# Altium PCB PCB1.PcbDoc
Units mm, origin at the board's own origin, x right, y up, seen from the top; angles counter-clockwise.
Board outline 50 x 50 mm, 2 copper layers (Top Layer, Bottom Layer); 18 components, 9 nets, 49 pads, 8 vias.
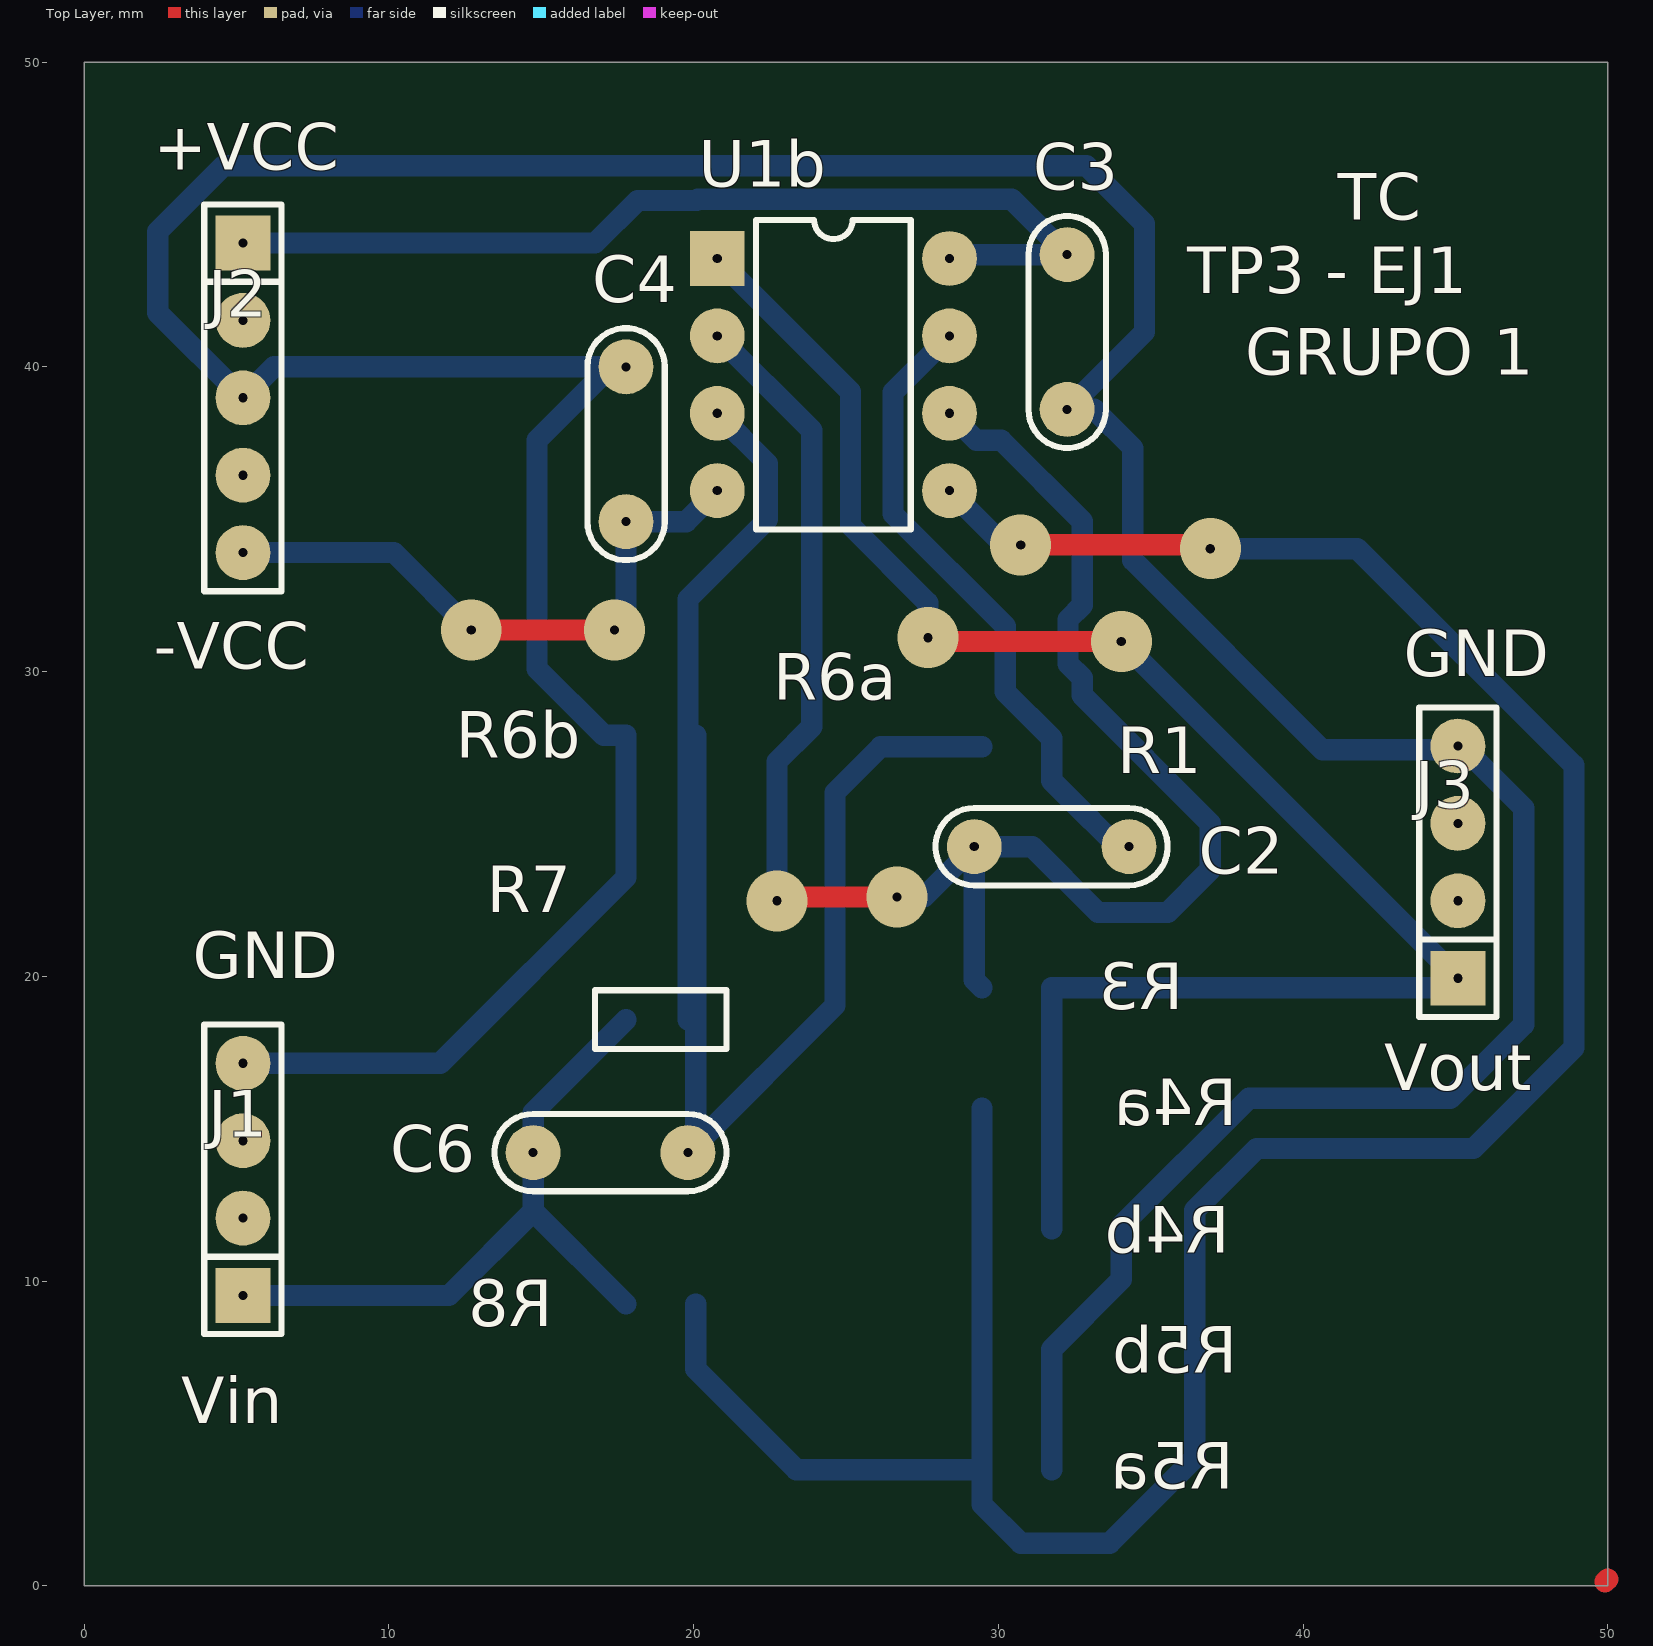
[diagram p0: Top Layer view]
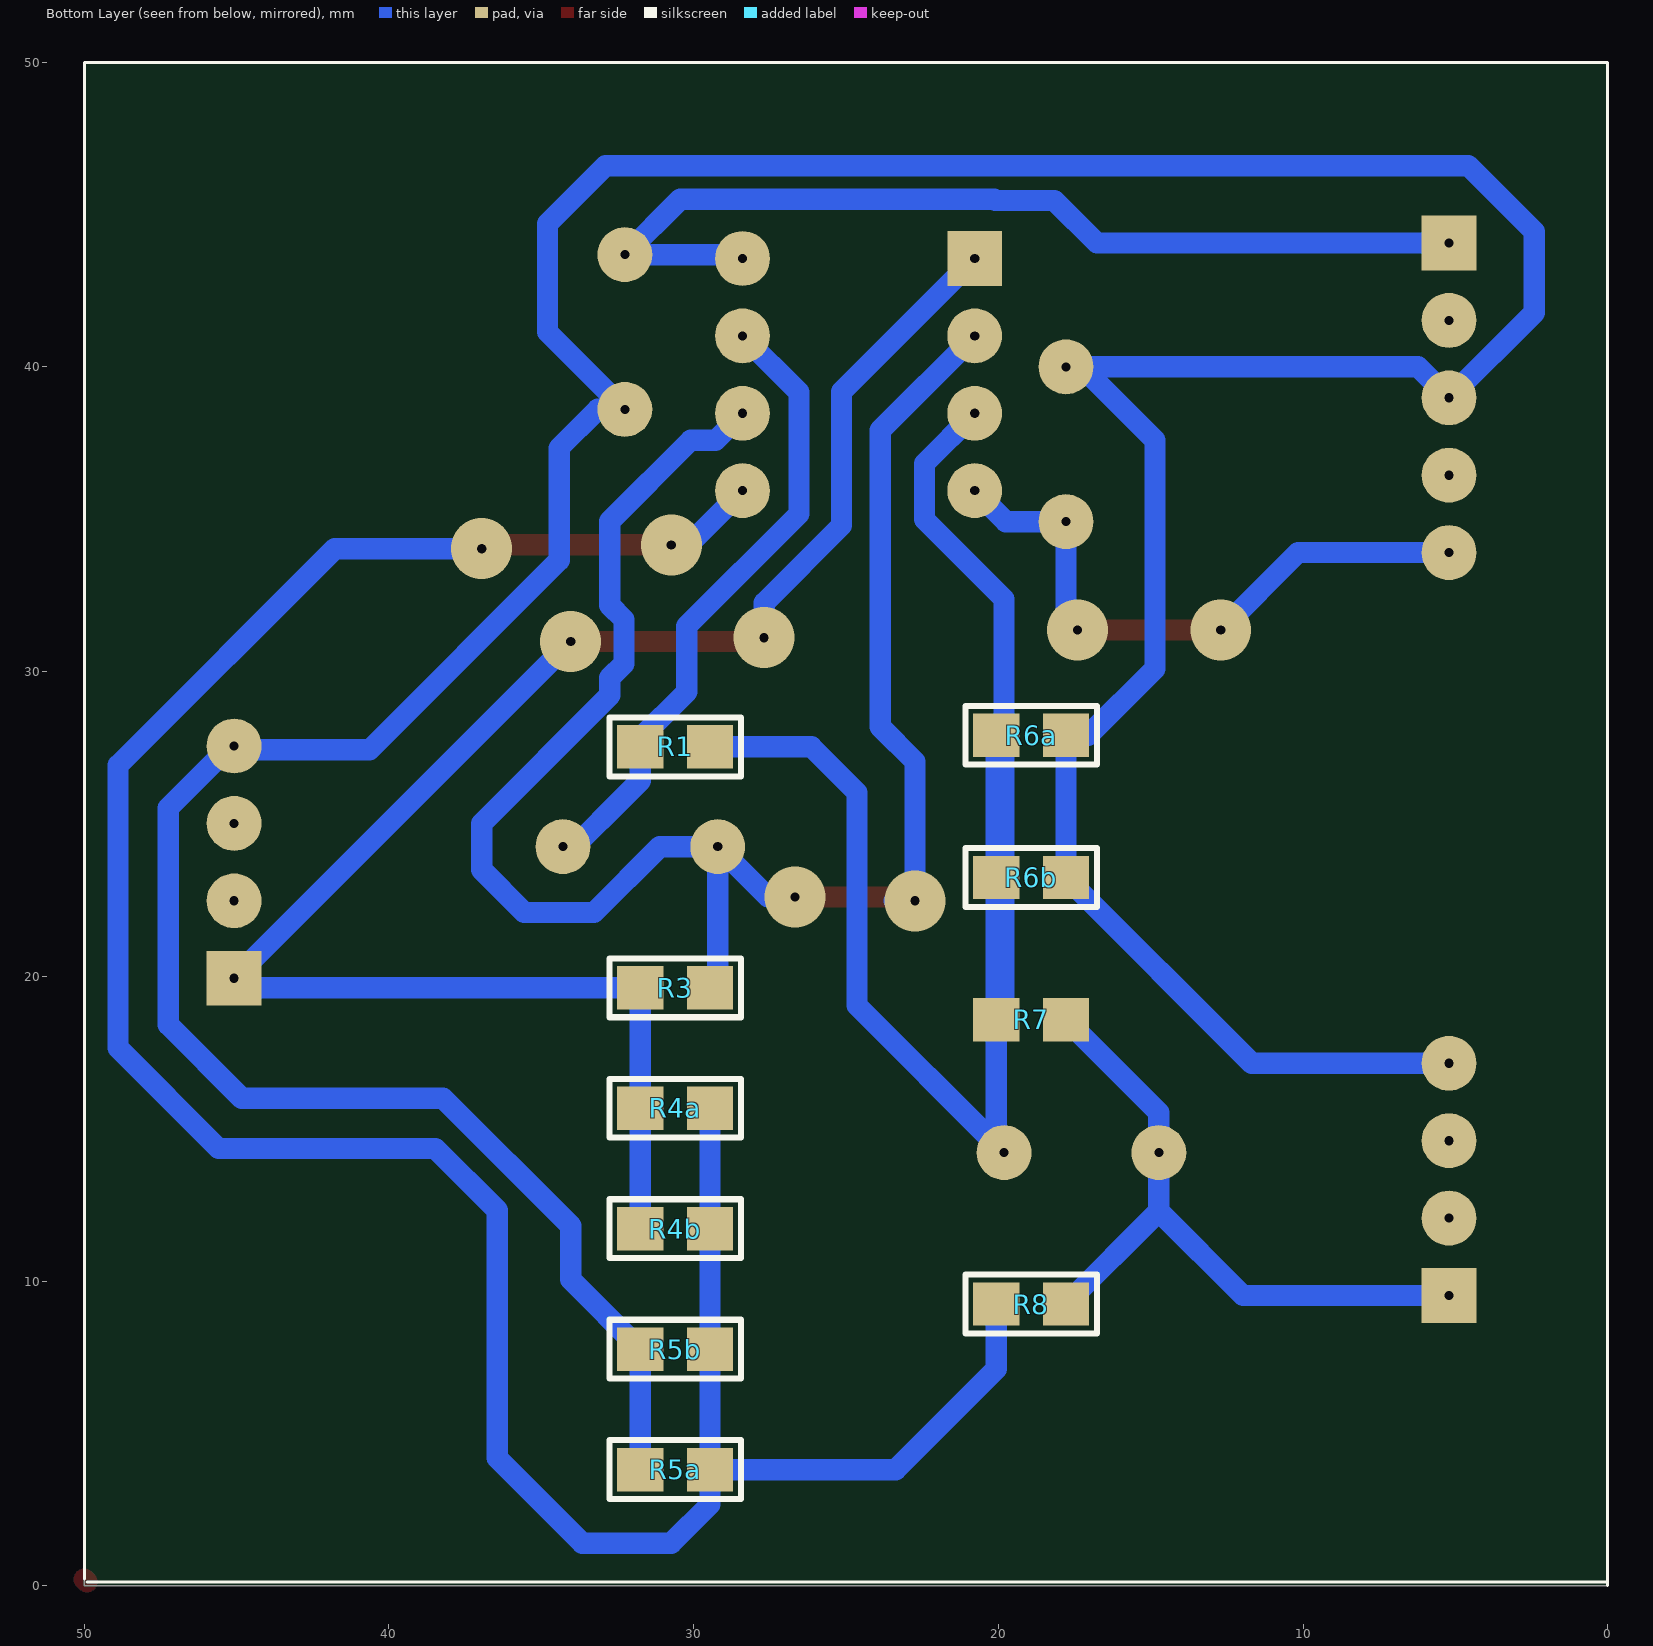
[diagram p1: Bottom Layer view, seen from below]

## Layer stack, top to bottom
Top Solder: solder mask 0.0102, Solder Resist, Dk 3.5
Top Layer: signal copper 0.0356
Dielectric 1: dielectric 0.32, FR-4, Dk 4.8
Bottom Layer: signal copper 0.0356
Bottom Solder: solder mask 0.0102, Solder Resist, Dk 3.5

## Board outline
0,50 50,50 50,0 0,0

## Design rules (kind name [scope] priority, off if disabled: settings)
Clearance [All] p1: gap=0.4 ignorepadtopadclearanceinfootprint=FALSE
HoleSize [All] p1: absolutevalues=TRUE maxlimit=0.5 minlimit=0.3 maxpercent=80.000 minpercent=20.000
PolygonConnect [All] p1: connectstyle=Relief reliefconductorwidth=0.254 reliefentries=4 polygonreliefangle="90 Angle" airgapwidth=0.254
RoutingVias [All] p1: holewidth=0.3 width=1.27 viastyle="Through Hole" minholewidth=0.3 minwidth=1.27 maxholewidth=0.3 maxwidth=1.27
SolderMaskExpansion [All] p1: expansion=0.102
Width [All] p1: maxlimit=0.9 minlimit=0.6 preferedwidth=0.7
29 further rules are at their usual default settings.

## Components (designator, comment, footprint, x,y, rotation, side; value= is the part's Value field where it differs from the comment)
C2 "CAP" CAP200 31.75,24.257 r180 top
C3 "CAP" CAP200 32.258,41.148 r270 top
C4 "CAP" CAP200 17.78,37.465 r90 top
C6 "CAP" CAP200 17.272,14.215 r0 top
J1 "CON4" SIP4 5.207,13.335 r90 top
J2 "CON5" SIP5 5.207,44.069 r270 top
J3 "CON4" SIP4 45.085,23.749 r90 top
R1 "RES" 0805#1 30.607,27.531 r180 bottom
R3 "RES" 0805#1 30.607,19.624 r180 bottom
R4a "RES" 0805#1 30.607,15.67 r0 bottom
R4b "RES" 0805#1 30.607,11.717 r0 bottom
R5a "RES" 0805#1 30.607,3.81 r180 bottom
R5b "RES" 0805#1 30.607,7.763 r180 bottom
R6a "RES" 0805#1 18.923,27.912 r0 bottom
R6b "RES" 0805#1 18.923,23.244 r0 bottom
R7 "RES" 0805#2 18.923,18.577 r0 top
R8 "RES" 0805#1 18.923,9.243 r0 bottom
U1b "LM833" DIP8 20.776,43.561 r0 top

## Footprints (in the part's own frame and the unit in brackets; to place one, negate y for a bottom-side part, rotate by r counter-clockwise, add the part's x,y. Pads: shape width x height; smd on the part's side, far side on the other; paste and mask are expansions set on the pad)
0805#1 [mil] "Pasivo 0805"
  rect 60x56 smd: 1(-45,0) 2(45,0)
  silkscreen extent -85,-38 85,38, body extent -39,-25 39,25, height 15
0805#2 [mil] "Pasivo 0805"
  rect 60x56 smd far side: 1(-45,0) 2(45,0)
  silkscreen extent -85,-38 85,38, body extent -40,-24 39,25, height 15
CAP200 [mm]
  round 1.8 hole 0.3: 1(-2.54,0) 2(2.54,0)
  silkscreen extent -3.81,-1.27 3.81,1.27, body extent -2.79,-1.17 2.79,1.12, height 6.24
DIP8 [mm]
  rect 1.8x1.8 hole 0.3: 1(0,0)
  round 1.8 hole 0.3: 2(0,-2.54) 3(0,-5.08) 4(0,-7.62) 5(7.62,-7.62) 6(7.62,-5.08) 7(7.62,-2.54) 8(7.62,0)
  silkscreen extent 1.27,-8.89 6.35,1.27, body extent -0.06,-9.21 7.7,1.59, height 4.5
SIP4 [mm]
  rect 1.8x1.8 hole 0.3: 1(-3.81,0)
  round 1.8 hole 0.3: 2(-1.27,0) 3(1.27,0) 4(3.81,0)
  silkscreen extent -5.08,-1.27 5.08,1.27, body extent -5.08,-1.27 5.08,1.27, height 8.38
SIP5 [mm]
  rect 1.8x1.8 hole 0.3: 1(0,0)
  round 1.8 hole 0.3: 2(2.54,0) 3(5.08,0) 4(7.62,0) 5(10.16,0)
  silkscreen extent -1.27,-1.27 11.43,1.27, body extent -1.27,-1.27 11.43,1.27, height 8.38

## Part data
U1b: "Dual Audio Operational Amplifier"

## Via types
v1: diameter 2, hole 0.3, Top Layer to Bottom Layer, 8 vias

## Nets (pads, with @x,y where several pads share a name; then routed paths per layer and width w, separated by ;. In a path a pad name is that pad's centre, name@x,y a point inside that pad or via, vN(x,y) a via of type N, cw(c..) or ccw(c..) an arc to the next point about the centre after c; other vN are vias at no path point)
+VCC: C3.1 J2.1 U1b.8 | length 32.6
  Bottom Layer w0.7: J2.1@4.953,44.069 J2.1 16.764,44.069 18.161,45.466 20.096,45.466 20.139,45.509 30.437,45.509 C3.1 28.523,43.688 U1b.8
-VCC: C4.1 J2.5 U1b.4 | length 20.7
  Top Layer w0.7: v1(12.7,31.369) v1(17.399,31.369)
  Bottom Layer w0.7: J2.5@4.953,34.163 J2.5 10.16,33.909 v1(12.7,31.369) ; v1(17.399,31.369) 17.78,31.75 C4.1 19.76,34.925 U1b.4
GND: C3.2 C4.2 J1.4 J2.3 J3.4 R5a.1 R5b.1 R6a.1 R6b.1 | length 149.9
  Bottom Layer w0.7: J1.4 11.681,17.145 R6b.1 R6a.1 17.046,27.912 14.859,30.099 14.859,37.592 C4.2@17.272,40.005 ; C4.2 C4.2@17.272,40.005 ; R5a.1 R5b.1 34.036,10.049 34.036,11.811 38.227,16.002 44.831,16.002 47.244,18.415 47.244,25.527 45.339,27.432 40.64,27.432 34.417,33.655 34.417,37.338 33.147,38.608 C3.2 34.798,41.148 34.798,44.704 32.893,46.609 4.572,46.609 2.413,44.45 2.413,41.783 J2.3 6.223,40.005 C4.2@17.272,40.005
NetC2_1: C2.1 R1.1 U1b.7 | length 21.3
  Bottom Layer w0.7: U1b.7 26.543,39.168 26.543,35.179 30.226,31.496 30.226,29.337 31.75,27.813 R1.1 31.75,26.416 C2.1@34.417,23.749
NetC2_2: C2.2 R3.2 U1b.2 U1b.6 | length 61.4
  Top Layer w0.7: v1(22.733,22.479) 22.86,22.606 v1(26.67,22.606)
  Bottom Layer w0.7: U1b.2 23.876,37.921 23.876,28.194 22.733,27.051 v1(22.733,22.479) v1@23.411,22.479 ; v1(26.67,22.606) 27.559,22.606 C2.2@29.019,24.066 ; U1b.6 29.286,37.591 30.1,37.591 32.751,34.94 32.751,32.178 32.286,31.713 32.286,30.263 32.751,29.798 32.751,29.225 36.957,25.019 36.957,23.495 35.56,22.098 33.274,22.098 31.115,24.257 C2.2 C2.2@29.019,24.066 ; R3.2 29.21,19.878 29.21,23.876 C2.2@29.019,24.066
NetC6_2: C6.2 R1.2 R6a.2 R6b.2 R7.2 U1b.3 | length 54.4
  Bottom Layer w0.7: C6.2 C6.2@20.066,14.469 ; R7.2@19.812,18.577 19.812,32.385 22.426,34.999 22.426,36.831 U1b.3 ; R6a.2 R6b.2 R7.2 C6.2@20.066,14.469 ; R1.2 26.134,27.531 24.638,26.035 24.638,19.041 C6.2@20.066,14.469
NetR4a_1: R4a.1 R4b.1 R5a.2 R5b.2 R8.2 U1b.5 | length 90.9
  Top Layer w0.7: v1(30.734,34.163) 36.83,34.163 v1(36.957,34.036)
  Bottom Layer w0.7: R8.2 20.066,7.112 23.368,3.81 R5a.2 ; U1b.5 30.174,34.163 v1(30.734,34.163) ; R4a.1 R4b.1 R5b.2 R5a.2 ; v1(36.957,34.036) 41.783,34.036 48.895,26.924 48.895,17.653 45.593,14.351 38.481,14.351 36.449,12.319 36.449,4.191 33.655,1.397 30.734,1.397 29.464,2.667 R5a.2
Vin: C6.1 J1.1 R7.1 R8.1 | length 22.5
  Bottom Layer w0.7: J1.1 11.966,9.525 14.732,12.291 ; R8.1 14.732,12.291 ; R7.1 14.732,15.529 C6.1 14.732,12.291
Vo: J3.1 R3.1 R4a.2 R4b.2 U1b.1 | length 59.4
  Top Layer w0.7: v1(27.686,31.115) 27.686,31.623 28.321,30.988 v1(34.036,30.988)
  Bottom Layer w0.7: U1b.1 25.146,39.191 25.146,34.798 27.686,32.258 v1(27.686,31.115) ; R4b.2 R4a.2 R3.1 44.77,19.624 J3.1 v1(34.036,30.988)
pads on no net: J1.2 J1.3 J2.2 J2.4 J3.2 J3.3
copper on no net: | length 0.1
  Top Layer w0.7: 49.911,0.127 50,0.216

## Silkscreen, mask and mechanical layers (free items; w line width, h text height)
Top Overlay:
  text "+VCC" at 2.286,46.482 h1.52
  text "TC" at 41.148,44.831 h1.52
  text "TP3 - EJ1" at 36.195,42.418 h1.52
  text "GRUPO 1" at 38.1,39.751 h1.52
  text "-VCC" at 2.286,30.099 h1.52
  text "GND" at 43.307,29.845 h1.52
  text "GND" at 3.556,19.939 h1.52
  text "Vout" at 42.672,16.256 h1.52
  text "Vin" at 3.175,5.334 h1.52
Bottom Overlay:
  lines w0.1: 0,0 0,50 50,50 50,0.216 ; 0,0.127 49.911,0.127